# Altium PCB PCB1.PcbDoc (part 3 of 4)
Units mil, origin at the board's own origin, x right, y up, seen from the top; angles counter-clockwise.
Board outline 3912 x 3804 mil, 4 copper layers (Top Layer, Layer 2, Layer 3, Bottom Layer), stack 23.756 mil thick; 248 components, 329 nets, 1182 pads, 457 vias.
Unrouted connection lines stored in the file: 4.
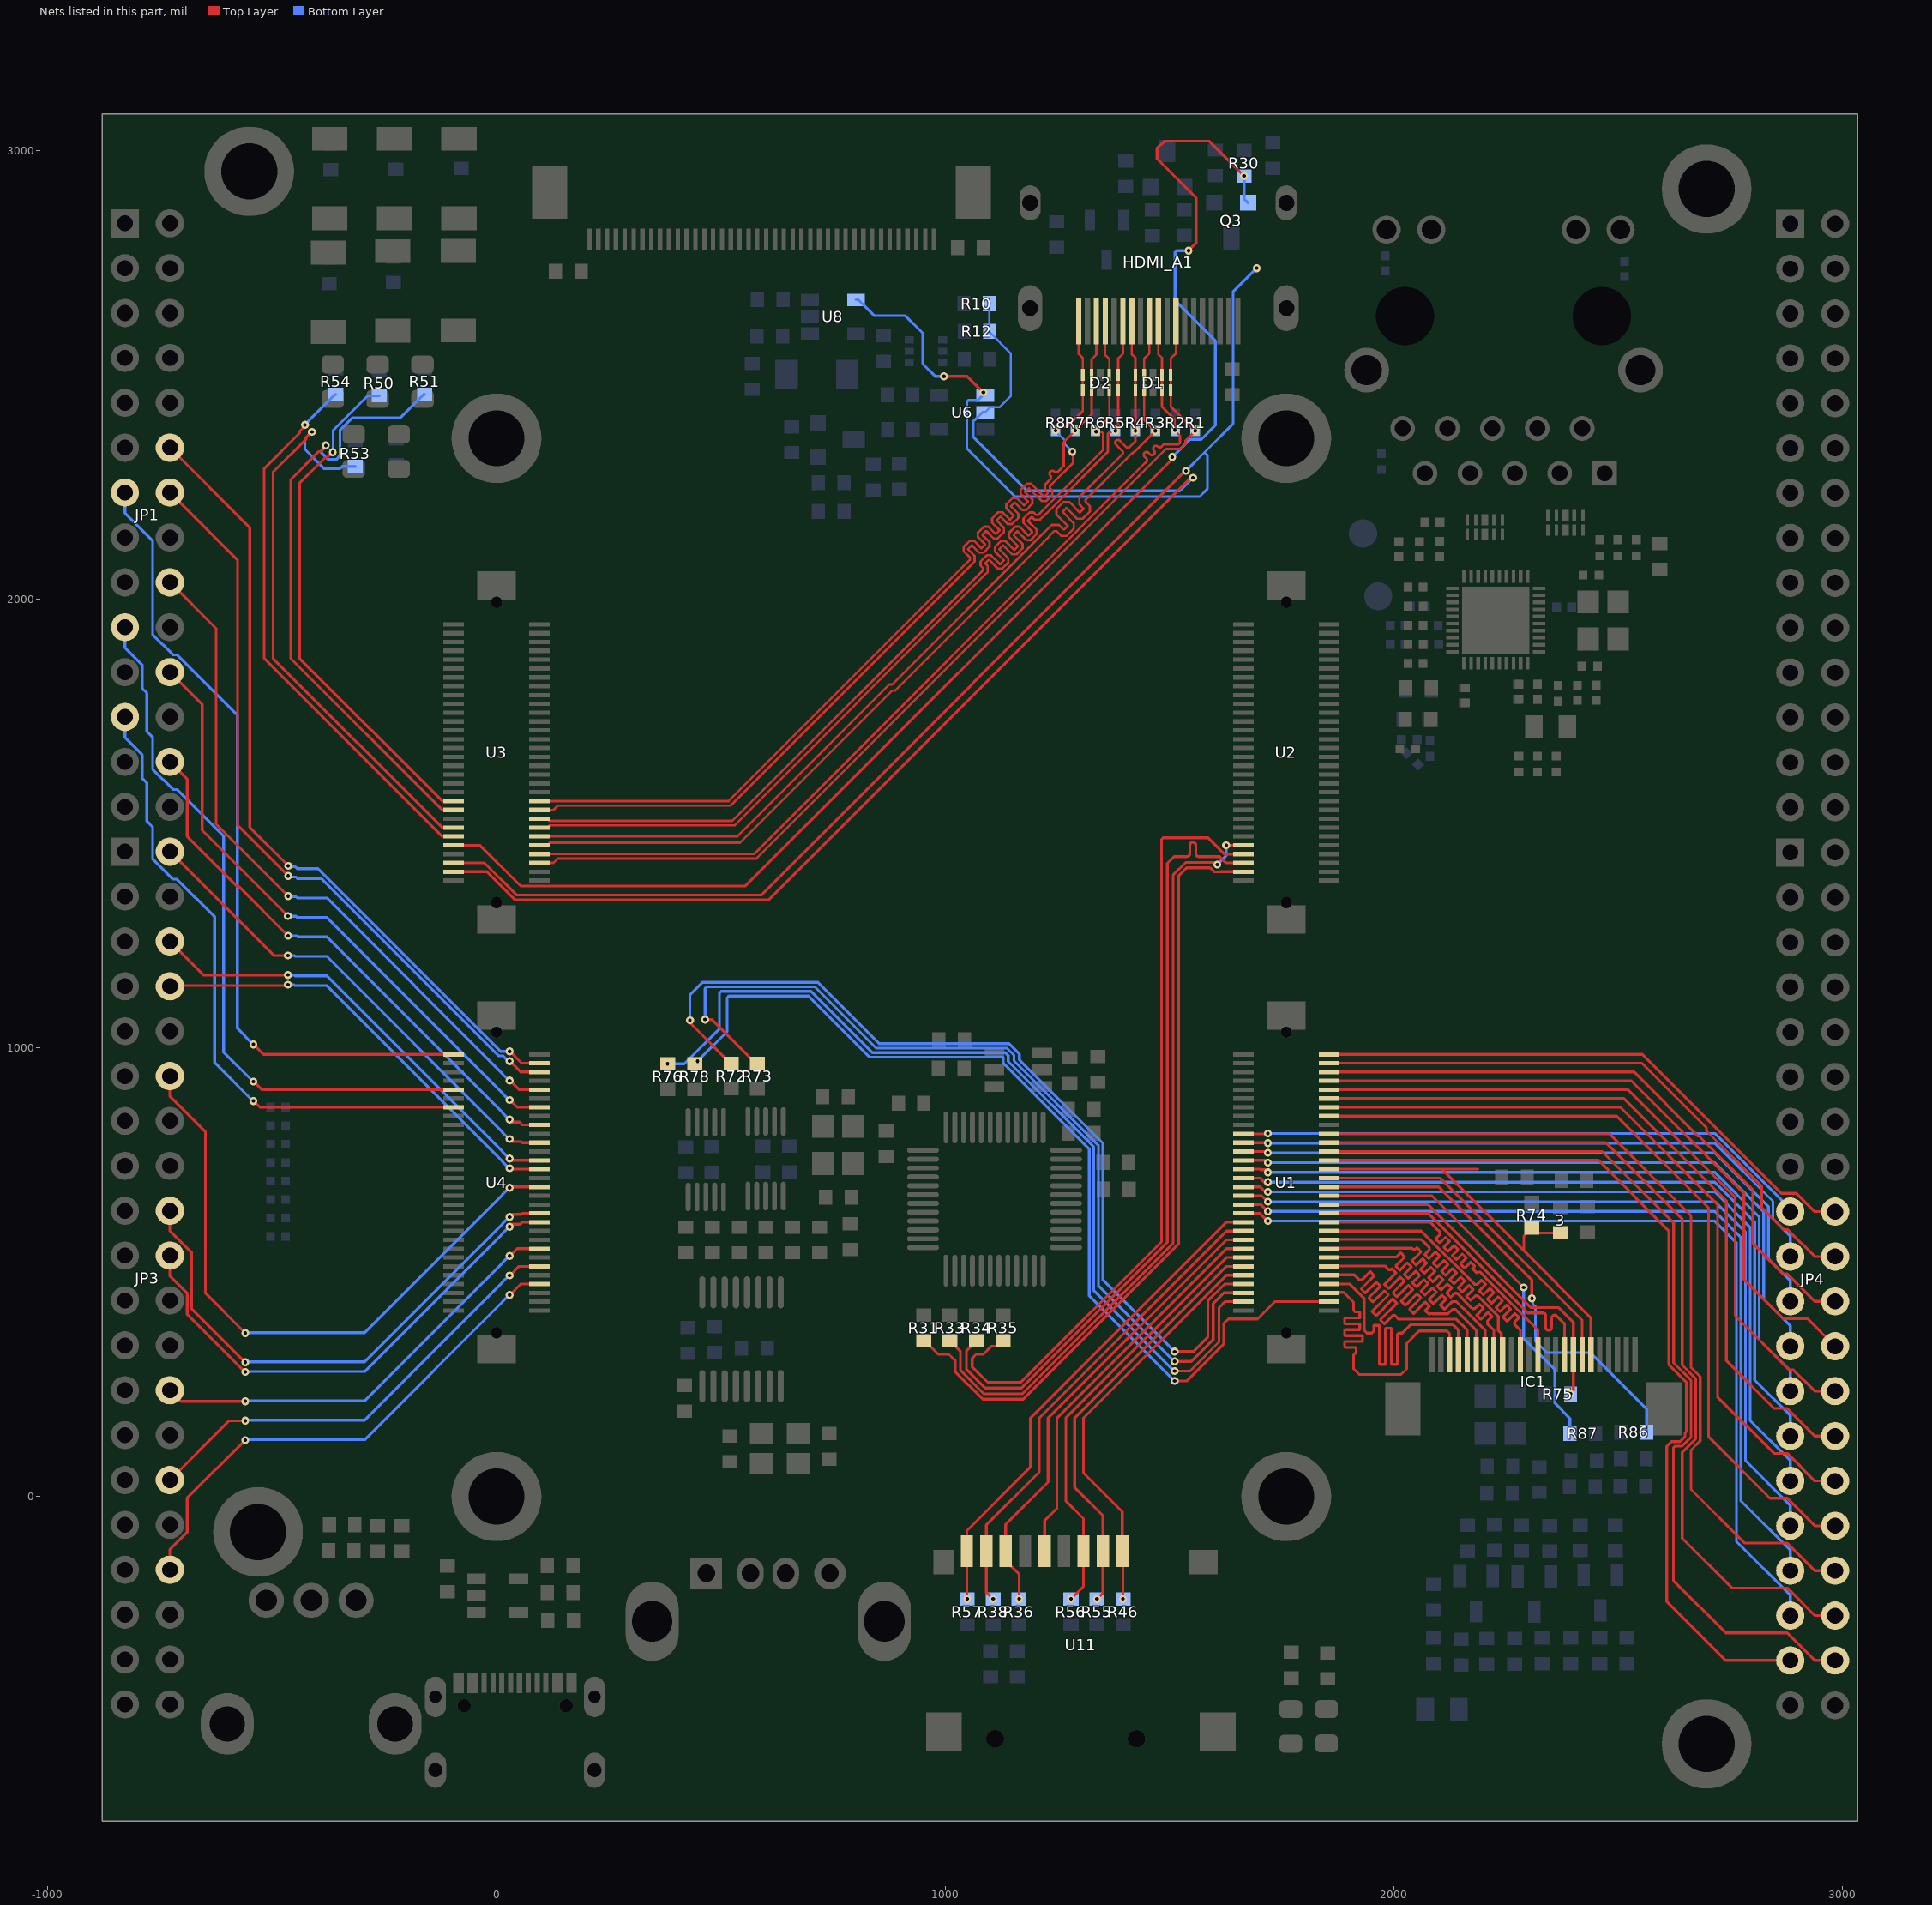
[diagram p5: the nets of this part, all layers, seen from the top]

## Via types
v1: diameter 17.7, hole 7.9, Top Layer to Bottom Layer, tented both sides, 445 vias
v2: diameter 17.7, hole 7.9, Top Layer to Bottom Layer, 12 vias

## Nets (pads, with @x,y where several pads share a name; then routed paths per layer and width w, separated by ;. In a path a pad name is that pad's centre, name@x,y a point inside that pad or via, vN(x,y) a via of type N, cw(c..) or ccw(c..) an arc to the next point about the centre after c; other vN are vias at no path point) (continued)
B16_N_L17: U3.5 U6.1 U8.4 | length 3803
  Top Layer w6.16: U3.5@-95.47,1411.93 -26.79,1411.93 44.98,1340.16 589.84,1340.16 1535.19,2285.51 v1(1536.62,2285.51) ; v1(997,2496) 1049,2496 v1(1085,2460)
  Bottom Layer w6.16: U8.4@800.77,2666.4 806.68,2666.4 842,2631.08 910.92,2631.08 949.76,2592.24 949.76,2524.08 977.84,2496 v1(997,2496) ; v1(1085,2460) 1085,2455.22 1072.26,2442.48 1051.61,2442.48 1048,2438.87 1048,2336 1156,2228 1567,2228 1584,2245 1584,2320 1577.55,2326.45 ; v1(1536.62,2285.51) 1577.55,2326.45 ; v1(1694,2737) 1641.37,2684.37 1641.37,2390.27 1577.55,2326.45
B16_N_L18: D2.4 D2.7 HDMI_A1.3 R7.1 U3.20 | length 2129.4
  Top Layer w5.24: U3.20@95.47,1549.72 517.24,1549.72 1051.26,2083.74 1055.23,2087.71 1055.23,2092.06 1040.86,2106.42 1040.86,2115.77 1054.65,2129.56 1064,2129.56 1080.11,2113.45 1080.97,2113.45 1088.76,2121.24 1088.76,2122.11 1072.66,2138.22 1072.66,2147.56 1086.44,2161.35 1095.79,2161.35 1111.9,2145.25 1112.76,2145.25 1120.55,2153.03 1120.55,2153.9 1104.45,2170.01 1104.45,2179.35 1118.24,2193.14 1127.58,2193.14 1143.69,2177.04 1144.56,2177.04 1152.35,2184.83 1152.35,2185.69 1136.24,2201.8 1136.24,2211.15 1150.03,2224.93 1159.38,2224.93 1175.48,2208.83 1176.35,2208.83 1184.14,2216.62 1184.14,2217.48 1168.03,2233.59 1168.03,2242.94 1181.82,2256.73 1191.17,2256.73 1219.74,2228.15 1220.6,2228.15 1228.39,2235.94 1228.39,2236.81 1222.77,2242.43 1222.77,2255.25 1231.29,2263.78 1232.22,2264.7 1234.07,2266.55 ccw(c1229.75,2270.88) 1234.07,2275.21 cw(c1238.4,2279.54) 1234.07,2283.87 cw(c1238.4,2279.54) 1242.73,2283.87 ccw(c1247.06,2288.19) 1251.38,2283.86 1264,2296.48 1264,2349 v1(1290,2375) 1326.31,2411.31 D2.7@1326.31,2464.75 D2.4@1326.31,2499 1326.31,2533.68 1336.83,2544.21 HDMI_A1.3@1336.83,2618
B16_N_L19: JP1.12 U4.58 | length 1782.7
  Top Layer w6.16: JP1.12@-728,2337 -550,2159 -550,1491.15 v1(-464.21,1405.36) ; v1(29,991.93) 29.83,991.93 56.02,965.74 U4.58@95.47,965.74
  Bottom Layer w6.16: v1(-464.21,1405.36) -462,1403.15 -447.98,1403.15 -443.83,1399 -398,1399 9.07,991.93 v1(29,991.93)
B16_N_L20: D1.1 D1.10 HDMI_A1.12 R1.1 U3.6 | length 2135.7
  Top Layer w5.24: U3.6@95.47,1411.93 126.89,1411.93 136.34,1421.37 578.59,1421.37 1491.22,2334 1524.18,2334 1535.35,2345.16 1535.35,2352.94 v1(1557,2374.6) 1502.37,2429.23 D1.10@1502.37,2464.75 D1.1@1502.37,2499 1502.37,2535.43 1514,2547.06 HDMI_A1.12@1514,2618
B16_N_L21: R54.2 U3.11 | length 1241.9
  Top Layer w6.16: v1(-426.85,2387.85) -426.85,2385.86 -438.65,2374.06 -438.65,2369.71 -517.74,2290.62 -517.74,1867.54 -121.19,1470.98 U3.11@-95.47,1470.98
  Bottom Layer w6.16: v1(-426.85,2387.85) -426.85,2388.7 -359.97,2455.58 R54.2@-358,2455.58
B16_N_L22: D2.1 D2.10 HDMI_A1.6 R5.1 U3.14 | length 2133.5
  Top Layer w5.24: U3.14@95.47,1490.67 113.19,1490.67 117.91,1495.39 529.87,1495.39 1087.64,2053.15 1094.61,2060.13 1094.61,2072.95 1088.99,2078.57 1088.99,2079.44 1096.78,2087.23 1097.64,2087.23 1117.39,2067.48 1126.74,2067.48 1140.53,2081.27 1140.53,2090.62 1120.78,2110.36 1120.78,2111.23 1128.57,2119.02 1129.43,2119.02 1149.18,2099.27 1158.53,2099.27 1172.32,2113.06 1172.32,2122.41 1152.57,2142.16 1152.57,2143.02 1160.36,2150.81 1161.23,2150.81 1180.97,2131.06 1190.32,2131.06 1204.11,2144.85 1204.11,2154.2 1184.36,2173.95 1184.36,2174.81 1192.15,2182.6 1193.02,2182.6 1198.64,2176.98 1211.46,2176.98 1224.64,2190.15 1362.39,2327.91 1362.39,2368.56 1366.04,2372.21 1376.9,2372.21 v1(1379.29,2374.6) 1379.29,2377.97 1385.37,2384.05 D2.10@1385.37,2464.75 D2.1@1385.37,2499 1385.37,2535.99 1395.89,2546.51 HDMI_A1.6@1395.89,2618
B16_N_L23: D1.4 D1.7 HDMI_A1.9 R3.1 U3.10 | length 2127.4
  Top Layer w5.24: U3.10@95.47,1451.3 113.19,1451.3 118.56,1456.67 118.56,1457.06 542.75,1457.06 881.1,1795.41 887.42,1795.41 1220.01,2128 1243.24,2151.23 1247.58,2151.23 1258.05,2140.77 1270.44,2140.77 1286.39,2156.71 1286.39,2169.11 1261.8,2193.7 1261.8,2194.56 1269.59,2202.35 1270.45,2202.35 1293.93,2178.88 1306.32,2178.88 1322.27,2194.82 1322.27,2207.22 1312.92,2216.57 1312.92,2220.91 1402.01,2309.99 1415.43,2323.42 1416.35,2323.42 1420.78,2327.85 1421.39,2327.85 v1(1468.14,2374.6) 1443.31,2399.43 D1.7@1443.31,2464.75 D1.4@1443.31,2499 1443.31,2535.43 1454.94,2547.06 HDMI_A1.9@1454.94,2618
B16_N_L24: R50.2 U3.19 | length 1152.1
  Top Layer w6.16: v1(-365.02,2326.93) -365.71,2326.93 -378.62,2314.03 -382.97,2314.03 -439,2258 -439,1867.54 -121.19,1549.72 U3.19@-95.47,1549.72
  Bottom Layer w6.16: v1(-365.02,2326.93) -364.06,2327.9 -364.06,2375.5 -286.97,2452.58 R50.2@-261,2452.58
B16_P_L1: JP3.34 U4.8 | length 1158.8
  Top Layer w6.16: JP3.34@-728,-163 -728,-117.55 -689.42,-78.98 -689.42,-2.9 -560.83,125.7 v1(-560,125.7) ; v1(29,449.43) 29.83,449.43 54.01,473.61 U4.8@95.47,473.61
  Bottom Layer w6.16: v1(-560,125.7) -559,126.7 -293.73,126.7 13.07,433.5 13.07,434.33 28.17,449.43 v1(29,449.43)
B16_P_L2: JP3.18 U4.24 | length 1201.2
  Top Layer w6.16: JP3.18@-728,637 -728,591.55 -679.26,542.82 -679.26,417.74 -560.83,299.3 v1(-560,299.3) ; v1(29,623.03) 34.77,628.8 54.98,628.8 57.26,631.09 U4.24@95.47,631.09
  Bottom Layer w6.16: v1(-560,299.3) -553,299.3 -552,300.3 -293.73,300.3 13.07,607.1 13.07,607.93 28.17,623.03 v1(29,623.03)
B16_P_L3: JP3.6 U4.36 | length 1026
  Top Layer w6.16: JP3.6@-728,1237 -653.3,1162.3 v1(-465,1162.3) ; v1(29,753.23) 33.03,749.2 U4.36@95.47,749.2
  Bottom Layer w6.16: v1(-465,1162.3) -451,1162.3 -449,1160.3 -378.07,1160.3 13.07,769.16 13.07,768.33 28.17,753.23 v1(29,753.23)
B16_P_L4: JP3.30 U4.12 | length 1021.1
  Top Layer w6.16: JP3.30@-728,37 -595.9,169.1 v1(-560,169.1) ; v1(29,492.83) 29.83,492.83 49.98,512.98 U4.12@95.47,512.98
  Bottom Layer w6.16: v1(-560,169.1) -559,170.1 -293.73,170.1 13.07,476.9 13.07,477.73 28.17,492.83 v1(29,492.83)
B16_P_L5: JP3.20 U4.22 | length 1123.7
  Top Layer w6.16: JP3.20@-728,537 -728,491.55 -689.42,452.98 -689.42,406.2 -560.83,277.6 v1(-560,277.6) ; v1(29,601.33) 34.77,607.1 52.96,607.1 57.26,611.41 U4.22@95.47,611.41
  Bottom Layer w6.16: v1(-560,277.6) -553,277.6 -552,278.6 -293.73,278.6 13.07,585.4 13.07,586.23 28.17,601.33 v1(29,601.33)
B16_P_L6: JP3.26 U4.16 | length 974.9
  Top Layer w6.16: JP3.26@-728,237 -703.5,212.5 v1(-560,212.5) ; v1(29,536.23) 29.83,536.23 45.95,552.35 U4.16@95.47,552.35
  Bottom Layer w6.16: v1(-560,212.5) -559,213.5 -293.73,213.5 13.07,520.3 13.07,521.13 28.17,536.23 v1(29,536.23)
B16_P_L7: JP3.2 U4.40 | length 1092.5
  Top Layer w6.16: JP3.2@-728,1437 -496.7,1205.7 v1(-465,1205.7) ; v1(29,796.63) 34.77,790.86 54.97,790.86 57.26,788.57 U4.40@95.47,788.57
  Bottom Layer w6.16: v1(-465,1205.7) -451,1205.7 -449,1203.7 -378.07,1203.7 13.07,812.56 13.07,811.73 28.17,796.63 v1(29,796.63)
B16_P_L8: JP3.8 U4.34 | length 995.7
  Top Layer w6.16: JP3.8@-728,1137 -726.2,1138.8 -466.8,1138.8 v1(-465,1140.6) ; v1(29,731.53) 31.01,729.52 U4.34@95.47,729.52
  Bottom Layer w6.16: v1(-465,1140.6) -451,1140.6 -449,1138.6 -378.07,1138.6 13.07,747.46 13.07,746.63 28.17,731.53 v1(29,731.53)
B16_P_L9: JP1.19 U4.51 | length 1590.5
  Top Layer w6.16: v1(-542,924.83) -541.17,924.83 -523.03,906.68 U4.51@-95.46,906.68
  Bottom Layer w6.16: JP1.19@-828,1937 -828,1891.55 -789.42,1852.98 -789.42,1800.76 -779.26,1790.6 -779.26,1704.97 -766.58,1692.28 -766.58,1621.02 -721.13,1575.58 -712.02,1575.58 -608.14,1471.7 -608.14,990.13 -542.84,924.83 v1(-542,924.83)
B16_P_L10: JP1.23 U4.47 | length 1432.2
  Top Layer w6.16: v1(-542.01,881.43) -541.18,881.43 -527.07,867.31 U4.47@-95.46,867.31
  Bottom Layer w6.16: JP1.23@-828,1737 -828,1691.55 -789.42,1652.98 -789.42,1600.76 -779.26,1590.6 -779.26,1504.97 -766.58,1492.28 -766.58,1421.02 -721.13,1375.58 -712.02,1375.58 -628.46,1292.02 -628.46,967.05 -542.84,881.43 v1(-542.01,881.43)
B16_P_L11: JP1.22 U4.48 | length 1389.9
  Top Layer w6.16: JP1.22@-728,1837 -656.16,1765.16 -656.16,1484.67 v1(-465.02,1293.53) ; v1(29,883.43) 29.83,883.43 45.95,867.31 U4.48@95.47,867.31
  Bottom Layer w6.16: v1(-465.02,1293.53) -464.4,1292.91 -446.24,1292.91 -443.83,1290.5 -378.07,1290.5 13.07,899.36 13.07,898.53 28.17,883.43 v1(29,883.43)
B16_P_L12: JP1.26 U4.44 | length 1233.7
  Top Layer w6.16: JP1.26@-728,1637 -689.42,1598.42 -689.42,1471.06 -576.33,1357.96 -573.03,1357.96 v1(-464.59,1249.51) ; v1(29,840.03) 34.77,834.26 50.94,834.26 57.26,827.94 U4.44@95.47,827.94
  Bottom Layer w6.16: v1(-464.59,1249.51) -464.17,1249.1 -445.42,1249.1 -443.42,1247.1 -378.07,1247.1 13.07,855.96 13.07,855.13 28.17,840.03 v1(29,840.03)
B16_P_L13: JP1.18 U4.52 | length 1547.2
  Top Layer w6.16: JP1.18@-728,2037 -625,1934 -625,1498.57 v1(-464.39,1337.95) ; v1(29,926.83) 29.83,926.83 49.98,906.68 U4.52@95.47,906.68
  Bottom Layer w6.16: v1(-464.39,1337.95) -462.74,1336.31 -446.24,1336.31 -443.83,1333.9 -378.07,1333.9 13.07,942.76 13.07,941.93 28.17,926.83 v1(29,926.83)
B16_P_L14: JP3.12 U4.30 | length 1433.1
  Top Layer w6.16: JP3.12@-728,937 -728,891.55 -648.78,812.34 -648.78,453.18 v1(-560,364.4) ; v1(29,688.13) 31.01,690.15 U4.30@95.47,690.15
  Bottom Layer w6.16: v1(-560,364.4) -553,364.4 -552,365.4 -293.73,365.4 13.07,672.2 13.07,673.03 28.17,688.13 v1(29,688.13)
B16_P_L15: JP1.13 U4.59 | length 1808.9
  Top Layer w6.16: v1(-542,1007.59) -541.17,1007.59 -519.01,985.42 U4.59@-95.46,985.42
  Bottom Layer w6.16: JP1.13@-828,2237 -828,2191.55 -766.58,2130.13 -766.58,1921.02 -721.13,1875.58 -712.02,1875.58 -577.66,1741.22 -577.66,1043.25 v1(-542,1007.59)
B16_P_L16: Q3.2 R30.2 U3.9 | length 3184.9
  Top Layer w6.16: U3.9@-95.47,1451.3 -37.42,1451.3 53.39,1360.48 554.48,1360.48 1507,2313 1507,2315.13 v1(1505.93,2316.2) ; v1(1542,2776) 1559,2793 1559,2894 1472,2981 1472,3004 1488,3020 1588.46,3020 v1(1666,2942.46)
  Bottom Layer w6.16: v1(1505.93,2316.2) 1545.43,2355.71 1570.76,2355.71 1602,2386.95 1602,2575 1511.94,2665.06 1511.94,2772.39 1515.55,2776 v1(1542,2776) ; v1(1666,2942.46) 1666,2891.81 Q3.2@1674.79,2883.02
B16_P_L17: R10.1 R12.2 U3.3 U6.2 | length 2982.3
  Top Layer w6.16: U3.3@-95.47,1392.24 -21.47,1392.24 40.77,1330 607.52,1330 1548.76,2271.24 1550.89,2271.24 v1(1551.96,2270.17)
  Bottom Layer w5: U6.2@1089.18,2416 1100.68,2427.5 1121.5,2427.5 1146,2452 1146,2547.57 1098.54,2595.03 R10.1@1098.54,2658
  Bottom Layer w6.16: U6.2@1089.18,2416 1083.18,2416 1067.07,2399.89 1066.46,2399.89 1062.1,2395.53 1062.1,2361.67 1182.77,2241 1522.79,2241 v1(1551.96,2270.17)
B16_P_L18: D2.5 D2.6 HDMI_A1.1 R8.1 U3.18 | length 2165.6
  Top Layer w5.24: U3.18@95.47,1530.04 126.77,1530.04 136.21,1539.48 521.48,1539.48 1058.5,2076.5 1065.47,2083.47 1065.47,2096.3 1051.1,2110.67 1051.1,2111.53 1058.89,2119.32 1059.76,2119.32 1075.87,2103.21 1085.21,2103.21 1099,2117 1099,2126.35 1082.9,2142.46 1082.9,2143.32 1090.69,2151.11 1091.55,2151.11 1107.66,2135.01 1117.01,2135.01 1130.79,2148.79 1130.79,2158.14 1114.69,2174.25 1114.69,2175.11 1122.48,2182.9 1123.34,2182.9 1139.45,2166.8 1148.8,2166.8 1162.59,2180.58 1162.59,2189.93 1146.48,2206.04 1146.48,2206.9 1154.27,2214.69 1155.13,2214.69 1171.24,2198.59 1180.59,2198.59 1194.38,2212.38 1194.38,2221.72 1178.27,2237.83 1178.27,2238.7 1186.06,2246.49 1186.92,2246.49 1215.5,2217.91 1224.85,2217.91 1238.63,2231.7 1238.63,2241.05 1233.01,2246.67 1233.01,2251.01 1238.53,2256.53 1285,2303 1285,2326 v2(1283,2328) ; v1(1246,2375) 1254.5,2383.5 1271.5,2383.5 1306.63,2418.63 D2.6@1306.63,2464.75 D2.5@1306.63,2499 1306.63,2536.66 1297.46,2545.83 HDMI_A1.1@1297.46,2618
  Bottom Layer w5.24: v1(1246,2375) R8.1@1246,2374.6 1246,2373.61 1266.57,2353.05 1266.57,2344.43 v2(1283,2328)
B16_P_L19: JP1.14 U4.56 | length 1704
  Top Layer w6.16: JP1.14@-728,2237 -577,2086 -577,1495.62 v1(-464.23,1382.86) ; v1(29,970.23) 29.83,970.23 54.01,946.05 U4.56@95.47,946.05
  Bottom Layer w6.16: v1(-464.23,1382.86) -462.03,1380.65 -447.18,1380.65 -443.83,1377.3 -390.67,1377.3 4.86,981.77 14.96,981.77 26.5,970.23 v1(29,970.23)
B16_P_L20: D1.2 D1.9 HDMI_A1.10 R2.1 U3.8 | length 2135.6
  Top Layer w5.24: U3.8@95.47,1431.61 574.35,1431.61 1445.85,2303.11 1447.71,2304.97 ccw(c1443.38,2309.29) 1447.71,2313.62 1444.12,2317.2 cw(c1448.45,2321.53) 1444.12,2325.86 cw(c1448.45,2321.53) 1452.78,2325.86 1456.36,2322.28 ccw(c1460.69,2326.6) 1465.02,2322.28 ccw(c1460.69,2326.6) 1465.02,2330.93 cw(c1469.34,2335.26) 1465.02,2339.59 cw(c1469.34,2335.26) 1473.67,2339.59 ccw(c1478,2343.91) 1482.33,2339.59 1486.98,2344.24 1501.73,2344.24 1519.94,2344.24 1523.01,2347.31 1523.01,2364.03 1511.26,2375.79 v1(1511.26,2375.91) 1511.26,2399.61 1482.68,2428.19 D1.9@1482.68,2464.75 D1.2@1482.68,2499 1482.68,2537.22 1474.63,2545.27 HDMI_A1.10@1474.63,2618
B16_P_L21: R53.2 U3.13 | length 1276.8
  Top Layer w6.16: v1(-411.51,2372.51) -411.51,2372.44 -424.73,2359.22 -424.73,2355.79 -498.05,2282.46 -498.05,1867.54 -121.19,1490.67 U3.13@-95.47,1490.67
  Bottom Layer w6.16: v1(-411.51,2372.51) -411.51,2372.44 -427,2356.95 -427,2333.19 -384.49,2290.68 -348.58,2290.68 -343.81,2295.46 R53.2@-315,2295.46
B16_P_L22: D2.2 D2.9 HDMI_A1.4 R6.1 U3.16 | length 2125.2
  Top Layer w5.24: U3.16@95.47,1510.35 113.19,1510.35 117.91,1505.63 525.63,1505.63 1080.4,2060.4 1084.37,2064.37 1084.37,2068.71 1078.75,2074.33 1078.75,2083.68 1092.54,2097.47 1101.88,2097.47 1121.63,2077.72 1122.5,2077.72 1130.29,2085.51 1130.29,2086.38 1110.54,2106.12 1110.54,2115.47 1124.33,2129.26 1133.68,2129.26 1153.42,2109.51 1154.29,2109.51 1162.08,2117.3 1162.08,2118.17 1142.33,2137.91 1142.33,2147.26 1156.12,2161.05 1165.47,2161.05 1185.21,2141.3 1186.08,2141.3 1193.87,2149.09 1193.87,2149.96 1174.12,2169.71 1174.12,2179.05 1187.91,2192.84 1197.26,2192.84 1202.88,2187.22 1207.22,2187.22 1217.4,2197.4 1352.15,2332.15 1352.15,2368.56 1349.08,2371.63 1337.37,2371.63 v1(1336.11,2372.89) ; v1@1335,2374 1365.68,2404.68 D2.9@1365.68,2464.75 D2.2@1365.68,2499 1365.68,2534.36 1356.52,2543.52 HDMI_A1.4@1356.52,2618
B16_P_L23: D1.5 D1.6 HDMI_A1.7 R4.1 U3.12 | length 2128.6
  Top Layer w5.24: U3.12@95.47,1470.98 536.98,1470.98 875.33,1809.33 881.66,1809.33 1210.17,2137.84 1237.48,2165.15 1253.35,2165.15 1263.81,2154.69 1264.68,2154.69 1272.47,2162.48 1272.47,2163.34 1247.88,2187.93 1247.88,2200.33 1263.82,2216.27 1276.22,2216.27 1299.69,2192.8 1300.56,2192.8 1308.35,2200.59 1308.35,2201.46 1299,2210.8 1299,2226.67 1392.16,2319.84 1394.02,2321.69 ccw(c1389.69,2326.02) 1394.02,2330.35 1380.51,2343.85 cw(c1384.83,2348.18) 1380.51,2352.51 cw(c1384.83,2348.18) 1389.16,2352.51 1402.67,2339 ccw(c1407,2343.33) 1411.33,2339 1423.71,2351.39 v1(1423.71,2374.6) v1(1423.71,2374.6) 1423.67,2464.71 D1.6@1423.63,2464.75 D1.5@1423.63,2499 1423.63,2537.22 1415.57,2545.27 HDMI_A1.7@1415.57,2618
B16_P_L24: R51.2 U3.17 | length 1358.6
  Top Layer w6.16: v1(-380.63,2342) -380.63,2340.72 -393.22,2328.14 -396.7,2328.14 -458.68,2266.15 -458.68,1867.54 -121.19,1530.04 U3.17@-95.47,1530.04
  Bottom Layer w6.16: v1@-380.63,2338.88 -390.18,2329.34 -390.18,2325.59 -375.59,2311 -357,2311 -349,2319 -349,2376 -321,2404 -213.55,2404 -161.97,2455.58 R51.2@-160,2455.58
B34_IO0: JP4.17 U1.41 | length 1294.8
  Top Layer w6.16: U1.41@1664.54,808.26 1717.99,808.26 v1(1719,809.26)
  Bottom Layer w6.16: v1(1719,809.26) 2715,809.26 2883.07,641.19 JP4.17@2883.07,635
B34_IO25: JP4.20 U1.58 | length 1338
  Top Layer w6.16: U1.58@1855.47,965.74 2552.39,965.74 2696.41,821.72 2696.41,814.82 2819.54,691.69 2819.54,643.98 2868.59,594.93 2877.7,594.93 2937.63,535 JP4.20@2983.07,535
B34_N_L1: IC1.22 U1.6 | length 771.4
  Top Layer w6.16: U1.6@1855.47,453.93 1856.54,455 1888,455 1910,433 1910,418 1910,414.92 1913.61,411.31 1923.18,411.31 1923.84,410.65 1923.84,398.81 1923.18,398.15 1890.66,398.15 1890,397.49 1890,385.65 1890.66,384.99 1923.18,384.99 1923.84,384.33 1923.84,372.49 1923.18,371.83 1890.66,371.83 1890,371.17 1890,359.33 1890.66,358.67 1929.34,358.67 1930,358.01 1930,346.17 1929.34,345.51 1890.66,345.51 1890,344.85 1890,333.01 1890.66,332.35 1914.92,332.35 1915.58,331.69 1915.58,319.85 1914.92,319.19 1913.61,319.19 1910,315.58 1910,285 1922,273 1923,272 2016,272 2028.48,284.48 2028.48,341.48 2056,369 2118,369 2124,363 IC1.22@2124,316
B34_N_L2: R76.2 U1.3 | length 2050.3
  Top Layer w6.16: v1(1511,279.6) 1544.96,279.6 1610,344.64 1610,421 1623.24,434.24 U1.3@1664.53,434.24
  Bottom Layer w6.16: v1(381.53,964.42) 418.42,964.42 497,1043 497,1122.07 500.61,1125.68 700.88,1125.68 837.44,989.11 1133.5,989.11 1140.29,982.32 1140.29,969.58 1331.14,778.73 1331.14,458.63 1510.17,279.6 v1(1511,279.6)
B34_N_L3: JP4.21 U1.37 | length 1452.2
  Top Layer w6.16: U1.37@1664.54,768.89 1715.98,768.89 v1(1719,765.86)
  Bottom Layer w6.16: v1(1719,765.86) 2715,765.86 2834.33,646.53 2834.33,529.18 2883.07,480.45 JP4.21@2883.07,435
B34_N_L4: R55.1 U1.11 U11.2 | length 950.7
  Top Layer w6.16: v1(1338.17,-228) 1351.33,-214.84 U11.2@1351.33,-121.32 1351.33,-42.33 1288.31,20.68 1288.31,174.89 1626.41,512.98 U1.11@1664.53,512.98
B34_N_L5: IC1.20 U1.10 | length 768.9
  Top Layer w6.16: U1.10@1855.47,493.3 1856.54,494.37 1911.63,494.37 1921,485 1923.18,482.82 1928.28,482.82 1946.48,501.02 1947.41,501.02 1955.78,492.64 1955.78,491.71 1927.18,463.11 1927.18,462.18 1935.56,453.81 1936.49,453.81 1960.07,477.39 1961,477.39 1969.37,469.01 1969.37,468.08 1944.48,443.19 1944.48,442.26 1952.85,433.88 1953.78,433.88 1978.09,458.19 1979.02,458.19 1987.39,449.81 1987.39,448.88 1951.51,412.99 1951.51,412.06 1959.88,403.69 1960.81,403.69 1996.7,439.57 1997.63,439.57 2006.01,431.2 2006.01,430.27 1970.12,394.38 1970.12,393.45 1978.5,385.08 1979.43,385.08 1997.62,403.27 2002.73,403.27 2010.81,395.18 2034.19,395.18 2139.19,395.18 2163.37,371 IC1.20@2163.37,316
B34_N_L6: R72.2 U1.7 | length 2073.5
  Top Layer w6.16: v1(431.12,1061.12) 433.33,1058.91 433.33,1053.65 521.44,965.54 R72.2@523.4,965.54 ; v1(1511,323) 1553,323 1585,355 1585,436 1622.61,473.61 U1.7@1664.53,473.61
  Bottom Layer w6.16: v1(431.12,1061.12) 431.12,1118.03 459.09,1146 715.91,1146 852.48,1009.43 1141.91,1009.43 1165.29,986.06 1165.29,973.32 1351.46,787.15 1351.46,482.54 v1(1511,323)
B34_N_L7: IC1.18 U1.14 | length 752.6
  Top Layer w6.16: U1.14@1855.47,532.67 1856.54,533.74 2000.96,533.74 2005.32,533.74 2014.37,542.79 2015.3,542.79 2023.68,534.42 2023.68,533.49 2004.42,514.23 2004.42,513.3 2012.79,504.92 2013.72,504.92 2029.32,520.52 2030.25,520.52 2038.62,512.14 2038.62,511.21 2023.03,495.62 2023.03,494.69 2031.4,486.31 2032.33,486.31 2047.93,501.91 2048.86,501.91 2057.23,493.53 2057.23,492.6 2041.64,477.01 2041.64,476.08 2050.01,467.7 2050.94,467.7 2066.54,483.3 2067.47,483.3 2075.84,474.92 2075.84,473.99 2060.25,458.4 2060.25,457.47 2068.62,449.09 2069.56,449.09 2085.15,464.69 2086.08,464.69 2094.46,456.31 2094.46,455.38 2078.86,439.79 2078.86,438.86 2087.24,430.48 2088.17,430.48 2106.45,448.76 2107.38,448.76 2115.75,440.39 2115.75,439.46 2103.44,427.14 2103.44,426.21 2111.81,417.84 2112.74,417.84 2129.24,434.34 2139.4,434.34 2167.19,406.55 2169.37,404.37 2202.74,371 IC1.18@2202.74,316
B34_N_L8: IC1.17 U1.16 | length 771.4
  Top Layer w6.16: U1.16@1855.47,552.35 1856.54,553.42 2040,553.42 2040.15,553.27 2042.33,551.09 2047.43,551.09 2050.74,554.4 2051.67,554.4 2060.04,546.03 2060.04,545.1 2040.51,525.56 2040.51,524.63 2048.88,516.25 2049.81,516.25 2063.02,529.47 2063.95,529.47 2072.33,521.09 2072.33,520.16 2059.12,506.95 2059.12,506.02 2067.49,497.64 2068.42,497.64 2081.64,510.85 2082.57,510.85 2090.94,502.48 2090.94,501.55 2077.73,488.34 2077.73,487.41 2086.1,479.03 2087.03,479.03 2100.25,492.24 2101.18,492.24 2109.55,483.87 2109.55,482.94 2096.34,469.73 2096.34,468.8 2104.72,460.42 2105.65,460.42 2118.86,473.63 2119.79,473.63 2128.16,465.26 2128.16,464.33 2117.64,453.8 2117.64,452.87 2126.01,444.5 2126.94,444.5 2135.38,452.93 2140.49,452.93 2169.53,423.89 2171.71,421.71 2172.71,420.71 2174.89,418.53 2179.99,418.53 2190.08,428.62 2191.01,428.62 2199.39,420.25 2199.39,419.32 2184.55,404.48 2184.55,403.55 2192.93,395.18 2193.86,395.18 2208.69,410.01 2209.62,410.01 2218,401.63 2218,400.7 2207.91,390.62 2207.91,385.51 2222.42,371 2222.42,346.32 IC1.17@2222.42,316
B34_N_L9: IC1.16 U1.18 | length 776.8
  Top Layer w6.16: U1.18@1855.47,572.04 1856.54,573.11 2060.89,573.11 2067.5,566.5 2069.68,564.32 2078.98,555.02 2078.98,549.91 2068.89,539.82 2068.89,538.89 2077.27,530.52 2078.2,530.52 2092.43,544.75 2093.36,544.75 2101.74,536.37 2101.74,535.44 2087.51,521.21 2087.51,520.28 2095.88,511.91 2096.81,511.91 2111.04,526.14 2111.97,526.14 2120.35,517.76 2120.35,516.83 2106.12,502.6 2106.12,501.67 2114.49,493.3 2115.42,493.3 2129.65,507.53 2130.58,507.53 2138.96,499.15 2138.96,498.22 2124.73,483.99 2124.73,483.06 2133.1,474.69 2134.03,474.69 2148.26,488.92 2149.19,488.92 2157.57,480.54 2157.57,479.61 2143.34,465.38 2143.34,464.45 2151.71,456.07 2152.64,456.07 2166.88,470.31 2167.81,470.31 2176.18,461.93 2176.18,461 2161.95,446.77 2161.95,445.84 2170.32,437.46 2171.26,437.46 2181.34,447.55 2186.45,447.55 2192.73,441.27 2194.91,439.09 2232.58,401.42 2232.58,369.89 2239.28,363.19 2239.28,318.83 IC1.16@2242.11,316
B34_N_L10: IC1.8 R75.1 U1.26 | length 814.7
  Top Layer w6.16: U1.26@1855.47,650.78 2075.66,650.78 2305.43,421 2367,421 2399.59,388.41 IC1.8@2399.59,316 2399.59,235.05 v1(2393.54,229)
B34_N_L11: IC1.12 U1.22 | length 771
  Top Layer w6.16: U1.22@1855.47,611.41 2080.44,611.41 2090.93,600.93 2093.1,598.75 2102.41,589.44 2102.41,584.34 2092.92,574.85 2092.92,573.92 2101.3,565.55 2102.23,565.55 2114.51,577.83 2115.44,577.83 2123.81,569.45 2123.81,568.52 2111.54,556.24 2111.54,555.31 2119.91,546.94 2120.84,546.94 2133.12,559.21 2134.05,559.21 2142.42,550.84 2142.42,549.91 2130.15,537.63 2130.15,536.7 2138.52,528.33 2139.45,528.33 2151.73,540.6 2152.66,540.6 2161.03,532.23 2161.03,531.3 2148.76,519.02 2148.76,518.09 2157.13,509.72 2158.06,509.72 2170.34,521.99 2171.27,521.99 2179.65,513.62 2179.65,512.69 2175.35,508.39 2175.35,507.46 2183.72,499.09 2184.66,499.09 2186.16,500.59 2191.26,500.59 2202.75,489.1 2204.93,486.92 2320.85,371 IC1.12@2320.85,316
B34_N_L12: R36.1 U1.17 U11.7 | length 1054.2
  Top Layer w6.16: v1(1164.67,-228) 1164.67,-172.84 1134.8,-142.97 U11.7@1134.8,-121.32 1134.8,-62.2 1229.26,32.26 1229.26,174.89 1626.41,572.04 U1.17@1664.53,572.04
B34_N_L13: JP4.32 U1.46 | length 1804.3
  Top Layer w6.16: U1.46@1855.47,847.63 2496.57,847.63 2701.43,642.77 2701.43,132.88 2837.89,-3.58 2876.2,-3.58 2937.63,-65 JP4.32@2983.07,-65
B34_N_L14: JP4.28 U1.50 | length 1647.7
  Top Layer w6.16: U1.50@1855.47,887 2512.88,887 2740.8,659.08 2740.8,303 2847.37,196.42 2876.2,196.42 2937.63,135 JP4.28@2983.07,135
B34_N_L15: R38.1 U1.19 U11.8 | length 1085.8
  Top Layer w6.16: v1(1106.83,-228) 1091.49,-212.66 U11.8@1091.49,-121.32 1091.49,-63.09 1209.57,55 1209.57,174.89 1626.41,591.72 U1.19@1664.53,591.72
B34_N_L16: JP4.24 U1.54 | length 1485
  Top Layer w6.16: U1.54@1855.47,926.37 2529.18,926.37 2780.17,675.38 2780.17,483.35 2867.09,396.42 2921.65,396.42 JP4.24@2983.07,335
B34_N_L17: JP4.38 U1.38 | length 2105.7
  Top Layer w6.16: U1.38@1855.47,768.89 2463.95,768.89 2623.16,609.68 2623.16,297.93 2662.16,258.93 2662.16,132.78 2641.61,112.23 2626.29,112.23 2622.69,108.62 2622.69,-186.68 2739.58,-303.58 2876.2,-303.58 2937.63,-365 JP4.38@2983.07,-365
B34_N_L18: R87.2 U1.28 | length 885.8
  Top Layer w6.16: U1.28@1855.47,670.46 2084.54,670.46 v1(2289,466)
  Bottom Layer w6.16: v1(2289,466) 2289,352 2358.3,282.7 2358.3,208.15 2392,174.45 R87.2@2392,141.13
B34_N_L19: JP4.33 U1.25 | length 1927
  Top Layer w6.16: U1.25@1664.54,650.78 1703.06,650.78 1718.17,635.66 v1(1719,635.66)
  Bottom Layer w6.16: v1(1719,635.66) 2715,635.66 2773.37,577.29 2773.37,-9.86 2883.07,-119.55 JP4.33@2883.07,-165
B34_N_L20: R86.2 U1.30 | length 1040.1
  Top Layer w6.16: U1.30@1855.47,690.15 2099.85,690.15 2307.21,482.79 v1(2307.21,441.75)
  Bottom Layer w6.16: v1(2307.21,441.75) 2309.42,439.54 2309.42,428.78 2315.38,422.83 2315.38,345.62 2340,321 2437,321 2563.09,194.91 R86.2@2563.09,143.13
B34_N_L21: JP4.36 U1.40 | length 2005.5
  Top Layer w6.16: U1.40@1855.47,788.57 2472.11,788.57 2642.37,618.31 2642.37,293.09 2672.32,263.14 2672.32,128.58 2642.37,98.63 2642.37,-93 2752.95,-203.58 2876.2,-203.58 2937.63,-265 JP4.36@2983.07,-265
B34_N_L22: JP4.23 U1.35 | length 1531.3
  Top Layer w6.16: U1.35@1664.54,749.2 1713.96,749.2 v1(1719,744.16)
  Bottom Layer w6.16: v1(1719,744.16) 2715,744.16 2824.17,634.99 2824.17,439.34 2883.07,380.45 JP4.23@2883.07,335
B34_N_L23: JP4.31 U1.27 | length 1847.9
  Top Layer w6.16: U1.27@1664.54,670.46 1705.08,670.46 1718.17,657.36 v1(1719,657.36)
  Bottom Layer w6.16: v1(1719,657.36) 2715,657.36 2783.53,588.83 2783.53,79.98 2883.07,-19.55 JP4.31@2883.07,-65
B34_N_L24: JP4.25 U1.33 | length 1610.5
  Top Layer w6.16: U1.33@1664.54,729.52 1701.91,729.52 1703.19,728.23 1713.23,728.23 v1(1719,722.46)
  Bottom Layer w6.16: v1(1719,722.46) 2715,722.46 2814.01,623.45 2814.01,349.5 2883.07,280.45 JP4.25@2883.07,235
B34_P_L1: R78.2 U1.4 | length 2166.7
  Top Layer w6.16: v1(1511,257.9) 1538.81,257.9 1621,340.09 1621,386 1631,396 1696,396 1734.24,434.24 U1.4@1855.47,434.24
  Bottom Layer w6.16: v1(448,970) 514,1036 514,1111.91 517.61,1115.52 695.48,1115.52 832.05,978.95 1129.29,978.95 1129.29,966.21 1320.98,774.52 1320.98,447.09 1510.17,257.9 v1(1511,257.9)
B34_P_L3: JP4.19 U1.39 | length 1373.1
  Top Layer w6.16: U1.39@1664.54,788.57 1717.99,788.57 v1(1719,787.56)
  Bottom Layer w6.16: v1(1719,787.56) 2715,787.56 2844.49,658.07 2844.49,619.02 2883.07,580.45 JP4.19@2883.07,535
B34_P_L4: R46.1 U1.9 U11.1 | length 927.8
  Top Layer w6.16: v1(1396,-228) 1396,-122.68 U11.1@1394.64,-121.32 1394.64,-33.64 1308,53 1308,174.89 1626.41,493.3 U1.9@1664.53,493.3
B34_P_L5: IC1.21 U1.8 | length 771.6
  Top Layer w6.16: U1.8@1855.47,473.61 1902,473.61 1902,473 1934,441 1934,370 1939.68,364.32 1948,364.32 1951.08,364.32 1954.69,367.93 1954.69,380.7 1955.35,381.36 1967.19,381.36 1967.85,380.7 1967.85,294.98 1968.51,294.32 1980.35,294.32 1981.01,294.98 1981.01,374.38 1981.67,375.04 1993.51,375.04 1994.17,374.38 1994.17,294.98 1994.83,294.32 2006.67,294.32 2007.33,294.98 2007.33,360.71 2010.94,364.32 2018.32,364.32 2037.34,383.34 2131.34,383.34 2143.68,371 IC1.21@2143.68,316
B34_P_L6: R73.2 U1.5 | length 2074.3
  Top Layer w6.16: v1(464.68,1062.97) 480.03,1062.97 566.23,976.77 569.72,976.77 R73.2@581.4,965.09 ; v1(1511,301.3) 1548.27,301.3 1597,350.03 1597,430 1620.93,453.93 U1.5@1664.53,453.93
  Bottom Layer w6.16: v1(464.68,1062.97) 464.68,1132.23 468.29,1135.84 709.1,1135.84 845.67,999.27 1137.7,999.27 1153.29,983.69 1153.29,970.95 1341.3,782.94 1341.3,470.17 1510.17,301.3 v1(1511,301.3)
B34_P_L7: IC1.19 U1.12 | length 758.4
  Top Layer w6.16: U1.12@1855.47,512.98 1856.54,514.05 1979.95,514.05 1986,508 1988.18,505.82 1993.28,505.82 1994.94,507.48 1995.87,507.48 2004.24,499.1 2004.24,498.17 1979.29,473.22 1979.29,472.29 1987.66,463.91 1988.59,463.91 2013.55,488.87 2014.48,488.87 2022.85,480.49 2022.85,479.56 1997.9,454.61 1997.9,453.68 2006.27,445.3 2007.2,445.3 2032.16,470.26 2033.09,470.26 2041.47,461.88 2041.47,460.95 2016.51,435.99 2016.51,435.06 2024.88,426.69 2025.81,426.69 2050.77,451.65 2051.7,451.65 2060.08,443.27 2060.08,442.34 2035.12,417.38 2035.12,416.45 2043.5,408.08 2044.43,408.08 2069.38,433.03 2070.31,433.03 2078.69,424.66 2078.69,423.73 2070.07,415.12 2070.07,414.19 2078.45,405.81 2079.38,405.81 2081.23,407.66 2086.34,407.66 2086.79,407.21 2113.21,407.21 2120.21,407.21 2130.05,417.05 2137,417.05 2146.84,407.21 2183.05,371 IC1.19@2183.05,316
B34_P_L8: IC1.14 U1.20 | length 769.3
  Top Layer w6.16: U1.20@1855.47,591.72 2060.76,591.72 2177.74,474.74 2179.92,472.56 2185.02,472.56 2194.51,482.05 2195.44,482.05 2203.81,473.67 2203.81,472.74 2190.18,459.11 2190.18,458.18 2198.56,449.81 2199.49,449.81 2213.12,463.43 2214.05,463.43 2222.42,455.06 2222.42,454.13 2208.8,440.5 2208.8,439.57 2217.17,431.2 2218.1,431.2 2231.73,444.82 2232.66,444.82 2241.03,436.45 2241.03,435.52 2227.41,421.89 2227.41,420.96 2235.78,412.59 2236.71,412.59 2250.34,426.21 2251.27,426.21 2259.64,417.84 2259.64,416.91 2243.21,400.47 2243.21,399.54 2251.58,391.16 2252.51,391.16 2268.95,407.6 2269.88,407.6 2278.26,399.23 2278.26,398.3 2268.77,388.81 2268.77,383.71 2275.92,376.56 2278.09,374.39 2281.48,371 IC1.14@2281.48,316
B34_P_L9: R56.1 U1.13 U11.3 | length 974.8
  Top Layer w6.16: v1(1280.33,-228) 1308.02,-200.31 U11.3@1308.02,-121.32 1308.02,-49.02 1268.63,-9.63 1268.63,174.89 1626.41,532.67 U1.13@1664.53,532.67
B34_P_L10: IC1.9 U1.24 | length 754.8
  Top Layer w6.16: U1.24@1855.47,631.09 2076.54,631.09 2298.32,409.32 2315.38,409.32 2331.62,409.32 cw(c2331.62,402.74) 2338.2,402.74 2338.2,376.9 ccw(c2344.78,376.9) 2351.36,376.9 2351.36,397.76 cw(c2357.94,397.76) 2362.59,402.41 2378.5,386.5 2379.9,385.1 IC1.9@2379.9,316
B34_P_L11: U1.15 U11.5 | length 879.5
  Top Layer w6.16: U11.5@1221.41,-121.32 1221.41,-53.59 1248.94,-26.06 1248.94,174.89 1626.41,552.35 U1.15@1664.53,552.35
B34_P_L12: JP4.26 U1.52 | length 1560.6
  Top Layer w6.16: U1.52@1855.47,906.68 2521.03,906.68 2760.48,667.23 2760.48,403.04 2881.07,282.45 2890.18,282.45 2937.63,235 JP4.26@2983.07,235
B34_P_L14: JP4.30 U1.48 | length 1723.6
  Top Layer w6.16: U1.48@1855.47,867.31 2504.72,867.31 2721.11,650.92 2721.11,222 2846.69,96.42 2876.2,96.42 2937.63,35 JP4.30@2983.07,35
B34_P_L15: R57.1 U1.21 U11.9 | length 1118.4
  Top Layer w6.16: v1(1049,-228) 1048.18,-227.18 U11.9@1048.18,-121.32 1048.18,-75.82 1189.89,65.89 1189.89,174.89 1626.4,611.4 U1.21@1664.53,611.4
  Bottom Layer w6.16: v1(1049,-228) R57.1@1050,-228
B34_P_L16: JP4.22 U1.56 | length 1409.5
  Top Layer w6.16: U1.56@1855.47,946.05 2535.08,946.05 2677.91,803.22 2680.17,803.22 2799.85,683.54 2799.85,563.67 2867.09,496.42 2876.2,496.42 2937.63,435 JP4.22@2983.07,435
B34_P_L17: JP4.37 U1.36 | length 2023.5
  Top Layer w6.16: U1.36@1855.47,749.2 2455.8,749.2 2613,592 2613,293.72 2652,254.72 2652,145 2648.88,141.88 2648.88,133.87 2637.4,122.39 2618.39,122.39 2608,112 2608,-234 2739,-365 JP4.37@2883.07,-365
B34_P_L18: JP4.35 U1.23 | length 2006.6
  Top Layer w6.16: U1.23@1664.54,631.09 1701.91,631.09 1701.91,630.23 1718.17,613.96 v1(1719,613.96)
  Bottom Layer w6.16: v1(1719,613.96) 2715,613.96 2763.21,565.75 2763.21,-99.7 2883.07,-219.55 JP4.35@2883.07,-265
B34_P_L19: JP4.18 U1.60 | length 1272.8
  Top Layer w6.16: U1.60@1855.47,985.42 2553.64,985.42 2863.13,675.94 2896.69,675.94 2937.63,635 JP4.18@2983.07,635
B34_P_L20: IC1.7 U1.32 | length 771.9
  Top Layer w6.16: U1.32@1855.47,709.83 2102.17,709.83 2419.27,392.73 IC1.7@2419.27,316
B34_P_L21: JP4.34 U1.42 | length 1905.3
  Top Layer w6.16: U1.42@1855.47,808.26 2480.26,808.26 2662.06,626.46 2662.06,287.77 2682.48,267.35 2682.48,124.37 2662.06,103.94 2662.06,16 2781.63,-103.58 2876.2,-103.58 2937.63,-165 JP4.34@2983.07,-165
B34_P_L22: 3.2 IC1.6 R74.2 U1.34 | length 1010
  Top Layer w6.16: U1.34@1855.47,729.52 2107.48,729.52 ; 2186.7,729.52 2107.48,729.52 ; 3.2@2371,587.46 2318,587.46 R74.2@2307,598.46 2305.03,598.46 2293.35,586.77 2293.35,584.8 2289.5,580.96 2289.5,547.5 ; IC1.6@2438.96,316 2438.96,398.04 2289.5,547.5 ; 2107.48,729.52 2289.5,547.5
B34_P_L23: JP4.29 U1.29 | length 1768.7
  Top Layer w6.16: U1.29@1664.54,690.15 1701.91,690.15 1712.99,679.06 v1(1719,679.06)
  Bottom Layer w6.16: v1(1719,679.06) 2715,679.06 2793.69,600.37 2793.69,169.82 2883.07,80.45 JP4.29@2883.07,35
B34_P_L24: JP4.27 U1.31 | length 1689.6
  Top Layer w6.16: U1.31@1664.53,709.83 1701.9,709.83 1710.97,700.76 v1(1719,700.76)
  Bottom Layer w6.16: v1(1719,700.76) 2715,700.76 2803.85,611.91 2803.85,259.66 2883.07,180.45 JP4.27@2883.07,135
FPGA_TCK: R31.1 U2.3 | length 1755.3
  Top Layer w6.16: R31.1@952.13,347.46 954.09,347.46 984.55,317 1008,317 1022,303 1022,278.63 1083.63,217 1174.11,217 1520,562.89 1520,1383 1538,1401 1590,1401 1598.76,1392.24 1599.23,1392.24 1599.4,1392.07 1612.6,1392.07 1612.77,1392.24 U2.3@1664.53,1392.24
FPGA_TDI: R33.1 U2.9 | length 1733.9
  Top Layer w6.16: R33.1@1010.13,347.46 1012.09,347.46 1023.78,335.77 1023.78,333.8 1034,323.58 1034,281 1086,229 1171.74,229 1508,565.26 1508,1385.37 1535.63,1413 1601,1413 v1(1606,1408) ; v1(1626,1451) 1626.15,1451.15 1664.38,1451.15 U2.9@1664.53,1451.3
  Bottom Layer w6.16: v1(1606,1408) 1626,1428 v1(1626,1451)
FPGA_TDO: R34.1 U2.5 | length 1752.3
  Top Layer w6.16: R34.1@1070,347.46 1068.03,347.46 1056.35,335.77 1056.35,333.8 1047,324.46 1047,284 1089,242 1170.37,242 1495,566.63 1495,1411 1510,1426 1538.44,1426 ccw(c1538.44,1432.58) 1545.02,1432.58 1545.02,1451.26 cw(c1551.6,1451.26) 1558.18,1451.26 1558.18,1432.58 ccw(c1564.76,1432.58) 1564.76,1426 1581,1426 1611.37,1426 1625.44,1411.93 U2.5@1664.53,1411.93
FPGA_TMS: R35.1 U2.7 | length 1765.3
  Top Layer w6.16: R35.1@1129,346.91 1117.32,335.23 1103.03,335.23 1084.8,317 1069,317 1060,308 1060,289 1094,255 1169,255 1482,568 1482,1464.39 1485.61,1468 1585.71,1468 1600,1453.71 1622.1,1431.61 U2.7@1664.53,1431.61

## Text inside footprints (layer, text, board x,y; h text height)
U8: Mechanical 9 "2" at 698.41,2619 h30 r180; Mechanical 9 "4" at 800.77,2656.4 h30 r180; Mechanical 9 "1" at 698.41,2581.6 h30 r180; Mechanical 9 "5" at 800.77,2581.6 h30 r180; Mechanical 9 "3" at 698.41,2656.4 h30 r180
U11: Top Overlay "Cd" at 1035.64,-172.32 h30 r270; Top Overlay "8" at 1088.64,-194.32 h30; Top Overlay "7" at 1132.64,-195.32 h30; Top Overlay "6" at 1174.64,-195.32 h30; Top Overlay "5" at 1216.64,-195.32 h30; Top Overlay "4" at 1258.64,-196.32 h30; Top Overlay "3" at 1305.64,-196.32 h30; Top Overlay "2" at 1347.64,-196.32 h30; Top Overlay "1" at 1390.64,-197.32 h30
U12: Mechanical 13 "41" at 2235.86,1958.91 h19.68 r180; Mechanical 13 "1" at 2319.52,1888.04 h19.68 r180; Mechanical 13 "10" at 2323.46,2029.77 h19.68 r180; Mechanical 13 "11" at 2304.76,2049.46 h19.68 r180; Mechanical 13 "20" at 2164.99,2049.46 h19.68 r180; Mechanical 13 "21" at 2146.29,2029.77 h19.68 r180; Mechanical 13 "30" at 2148.26,1888.04 h19.68 r180; Mechanical 13 "31" at 2164.01,1869.34 h19.68 r180; Mechanical 13 "40" at 2303.77,1869.34 h19.68 r180
USB1: Top Overlay "GND" at 725.37,-241 h40 r270; Top Overlay "D+" at 625.37,-241 h40 r270; Top Overlay "D-" at 535.37,-241 h40 r270; Top Overlay "VCC" at 445.37,-241 h40 r270; Top Overlay "USB-A" at 740.41,-572.97 h60 r180